# Altium PCB led_ring.PcbDoc
Units mm, origin at the board's own origin, x right, y up, seen from the top; angles counter-clockwise.
Board outline 28 x 28 mm, 2 copper layers (Top Layer, Bottom Layer), stack 0.97 mm thick; 20 components, 18 nets, 46 pads, 9 vias.
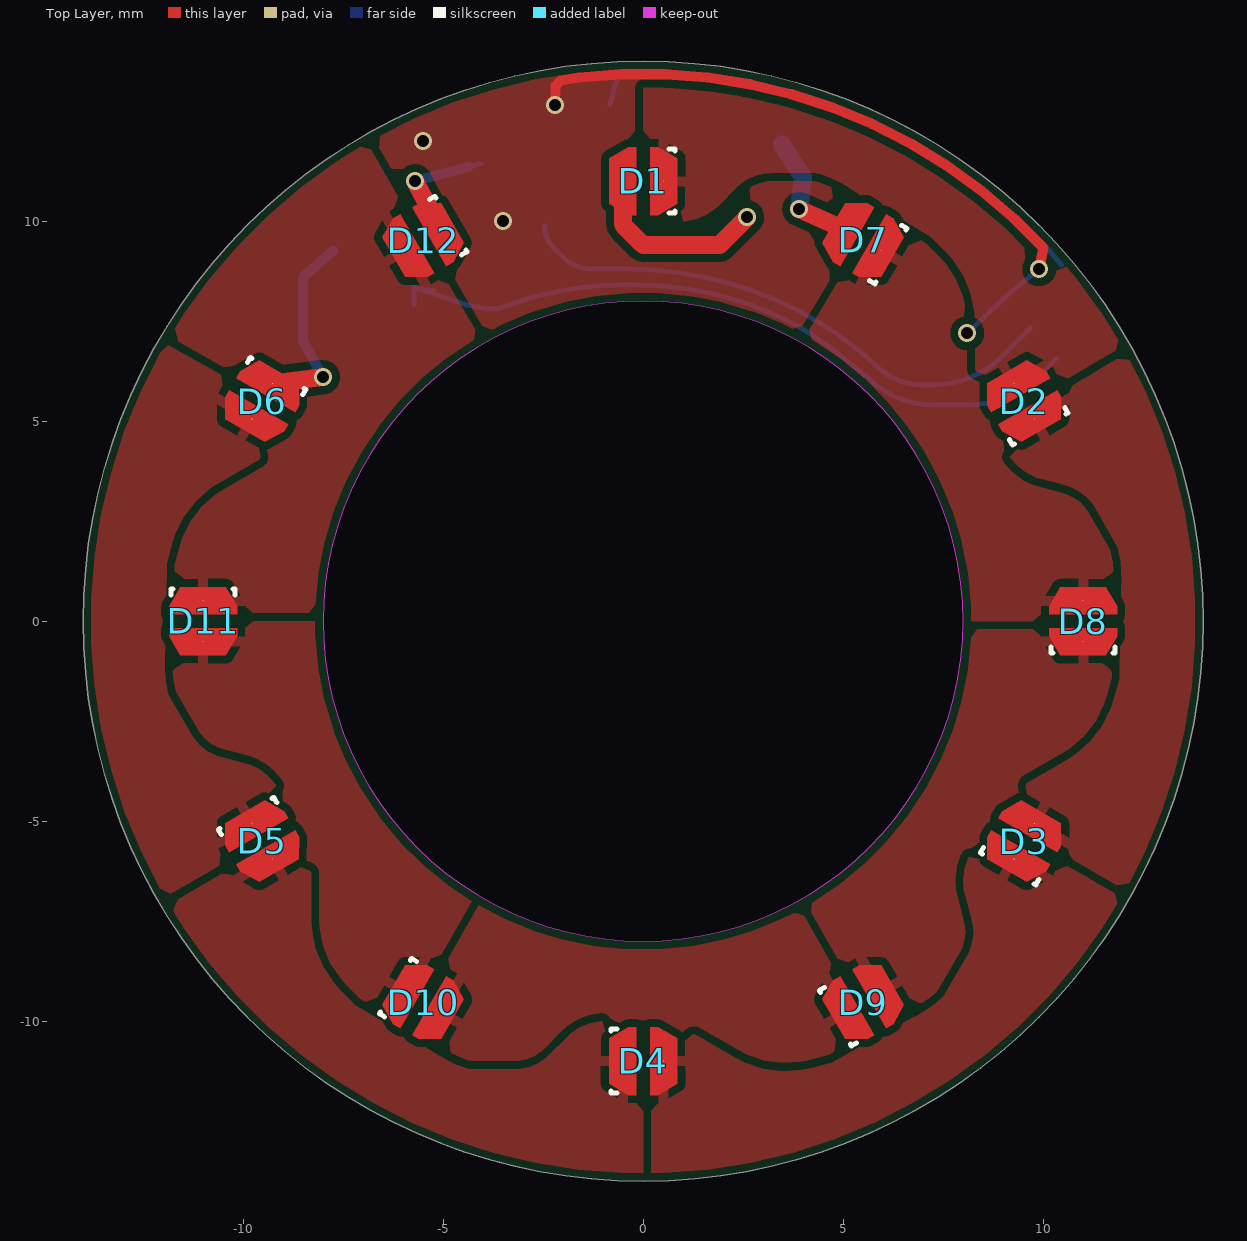
[diagram p0: Top Layer view]
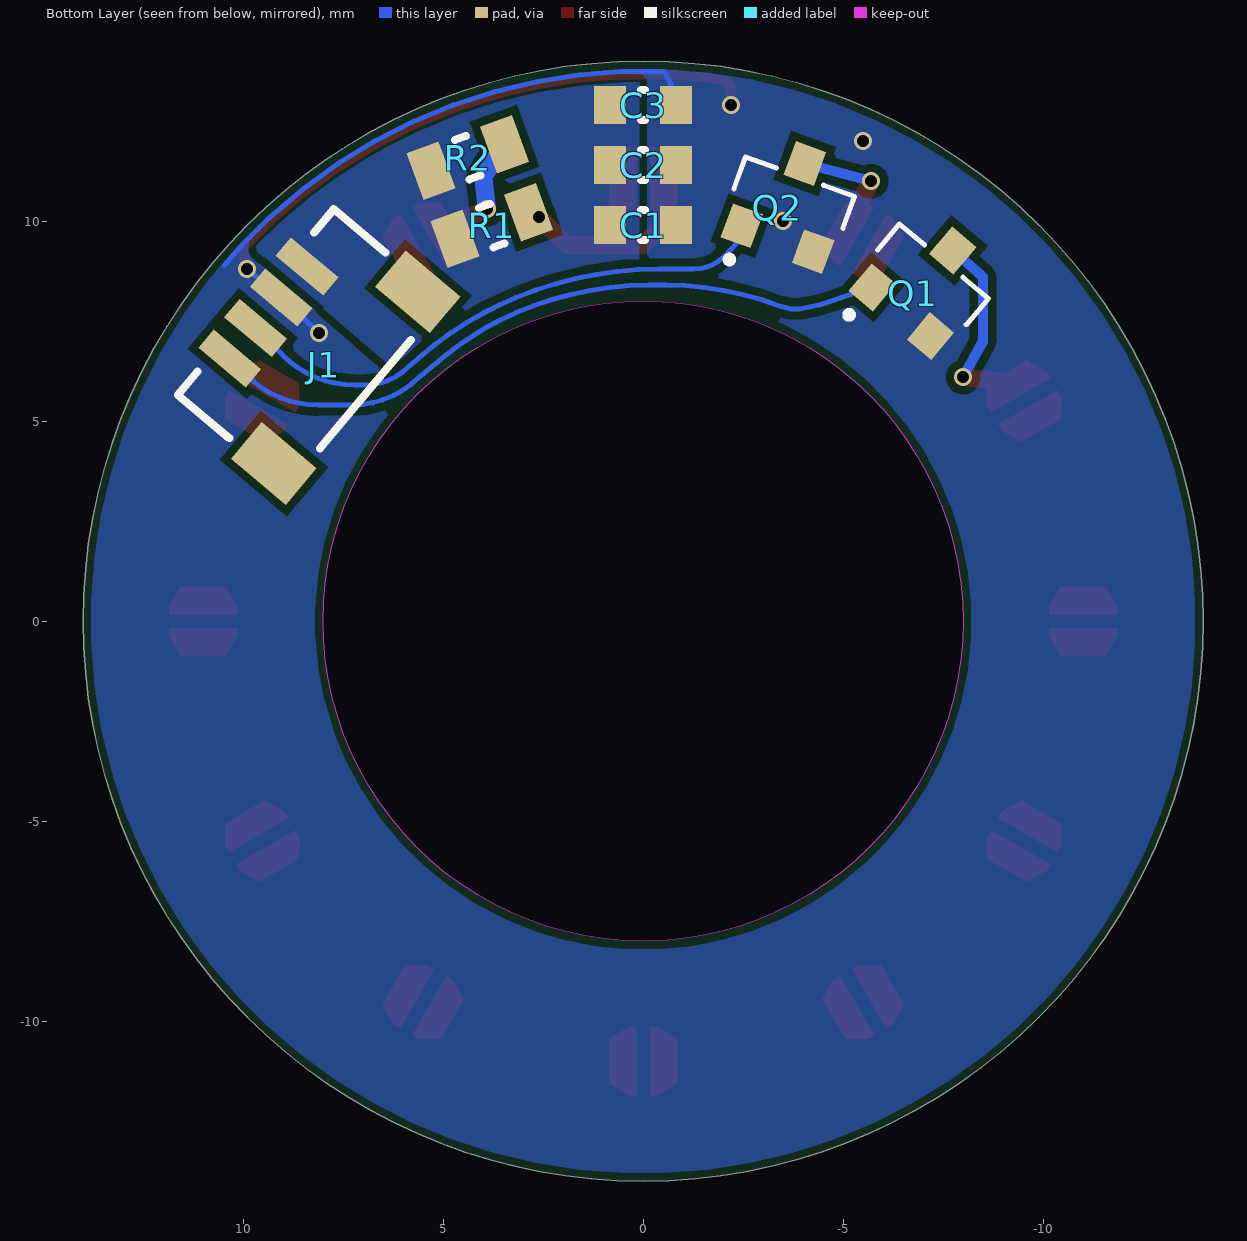
[diagram p1: Bottom Layer view, seen from below]
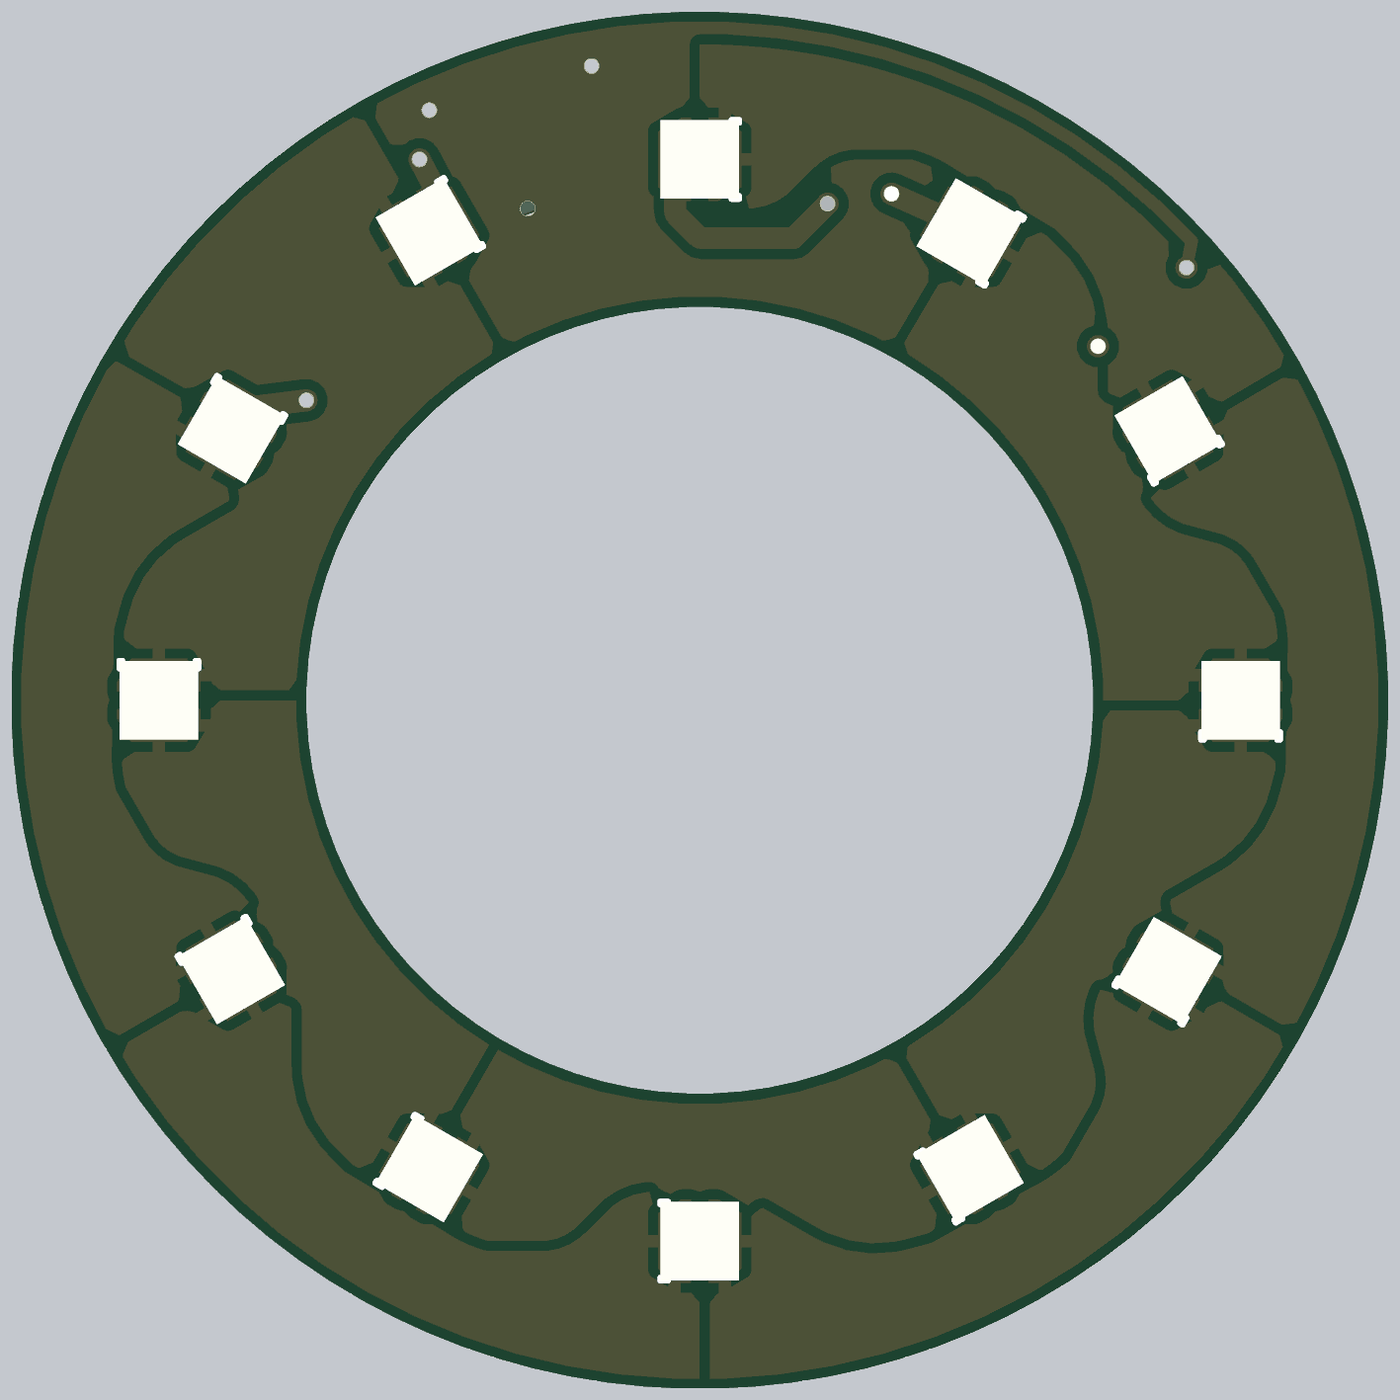
[diagram p2: 3D render of the assembled board from above, using the file's embedded part models]
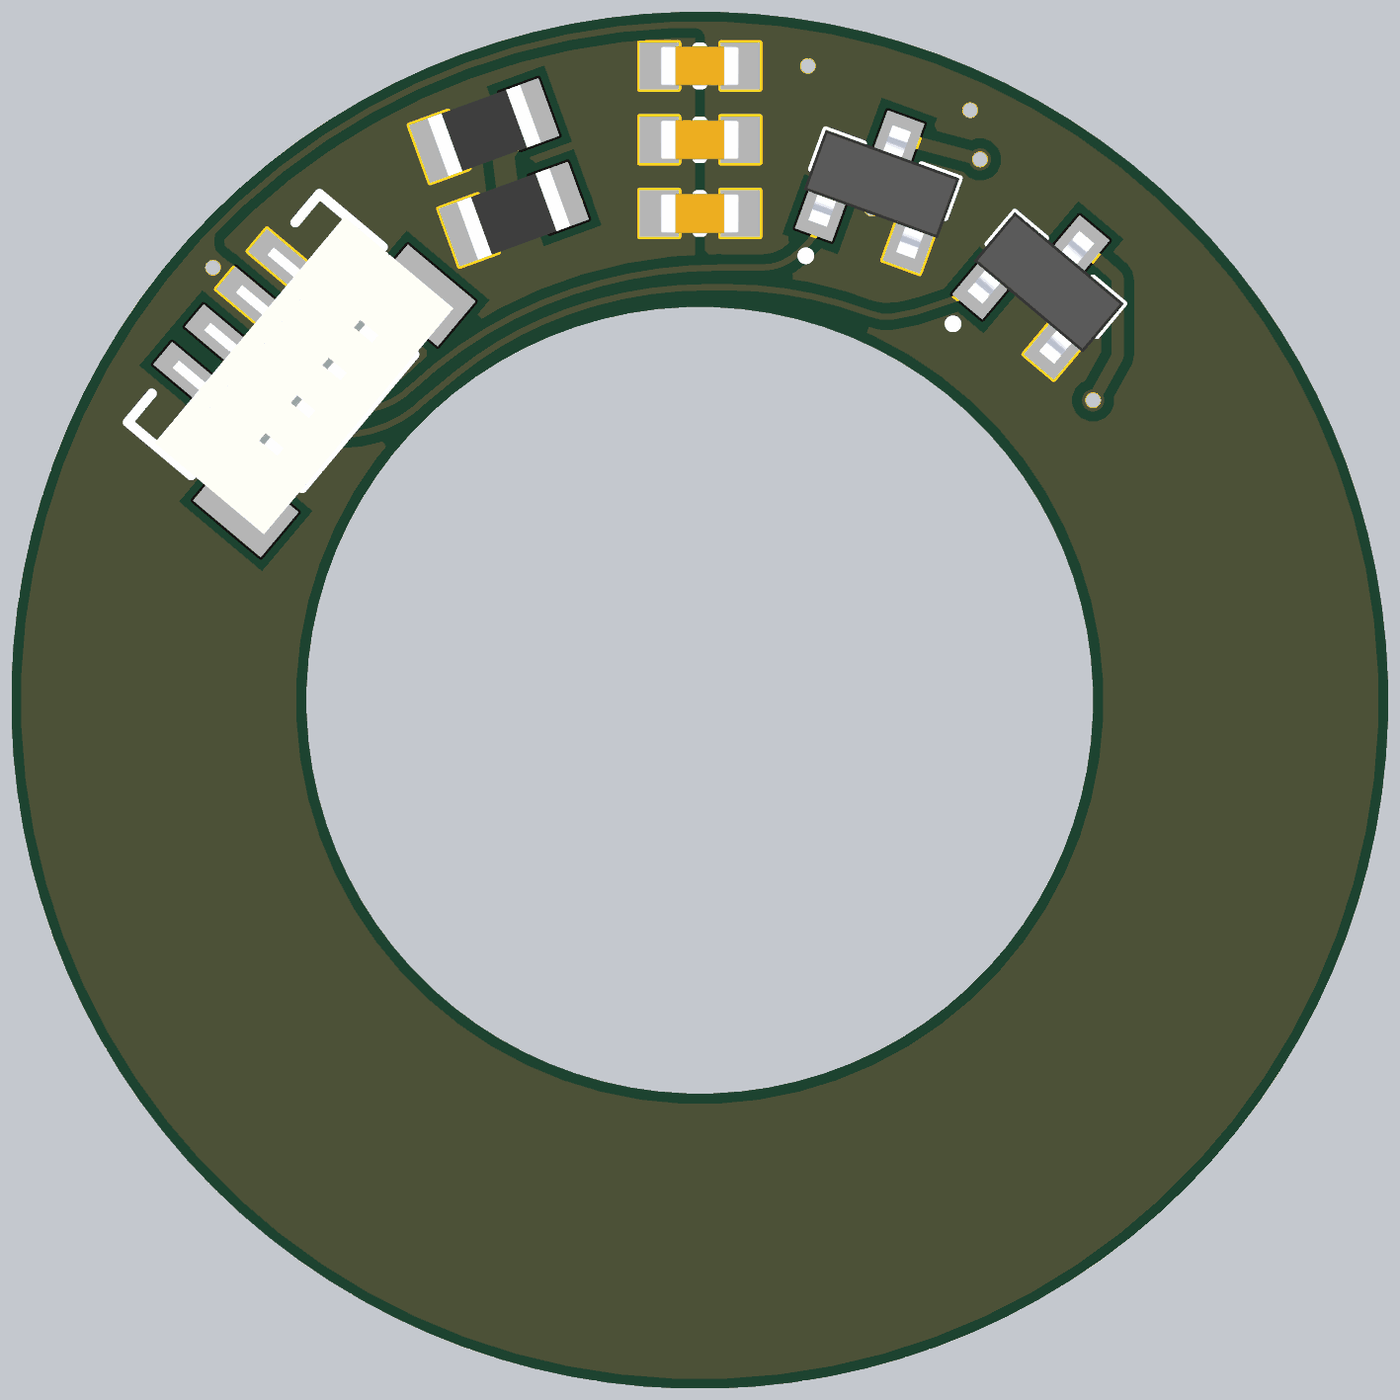
[diagram p3: 3D render of the assembled board from below, using the file's embedded part models]

## Layer stack, top to bottom
Top Solder: solder mask 0.015, SM-001, Dk 4
Top Layer: signal copper 0.035
Dielectric 5: core 0.9, FR4_TG135_TG150_Dk4.3_Df0.02, Dk 4.2
Bottom Layer: signal copper 0.035
Bottom Solder: solder mask 0.015, SM-001, Dk 4

## Board outline
-14,0 ccw(c0,0) 0,-14 ccw(c0,0) 14,0 ccw(c0,0) 0,14 ccw(c0,0)
cut-out: -8,0 ccw(c0,0) 0,-8 ccw(c0,0) 8,0 ccw(c0,0) 0,8 ccw(c0,0)

## Design rules (kind name [scope] priority, off if disabled: settings)
AssemblyTestPointUsage [All] p1: isadvanced=TRUE
AssemblyTestpoint [All] p1: isadvanced=TRUE testpointundercomponent=TRUE minsize=1.016 maxsize=2.54 preferedsize=1.524 minholesize=0 maxholesize=1.016 preferedholesize=0.813 testpointgrid=0.025 usegrid=TRUE gridoriginx=166.25 gridoriginy=192.7 gridtolerance=0 allowsidetop=TRUE allowsidebottom=TRUE
BoardOutlineClearance BoardOutlineClearance_1 [All] p1: isadvanced=TRUE gap=0.2 ignorepadtopadclearanceinfootprint=FALSE
Clearance Clearance_1 [All] p1: gap=0.2 ignorepadtopadclearanceinfootprint=FALSE
Clearance Clearance_1 [OnMid vs OnMid] p2: gap=0.1 ignorepadtopadclearanceinfootprint=FALSE sourcerule=43 cellrowname=All cellrowtype=0 cellcolname=All cellcoltype=0 innerlayers=TRUE
Clearance Clearance_2 [(ExistsOnLayer('Top Layer') Or ExistsOnLayer('Bottom Layer')) vs (ExistsOnLayer('Top Layer') Or ExistsOnLayer('Bottom Layer'))] p3: gap=0.1 ignorepadtopadclearanceinfootprint=FALSE sourcerule=43 cellrowname=All cellrowtype=0 cellcolname=All cellcoltype=0 outerlayers=TRUE
Clearance [All] p4: gap=0.254 ignorepadtopadclearanceinfootprint=FALSE ismatrix=TRUE
ComponentClearance ComponentClearance_LensHolder [InComponent('MP1')] p1: gap=-100 collisioncheckmode=3 verticalgap=-100 showdistances=FALSE
ComponentClearance [All] p2: isadvanced=TRUE gap=0.254 collisioncheckmode=3 verticalgap=0.254 showdistances=FALSE
FabricationTestPointUsage [All] p1: isadvanced=TRUE valid=0 allowmultiple=FALSE
FabricationTestpoint [All] p1: isadvanced=TRUE side=3 testpointundercomponent=TRUE minsize=1.016 maxsize=2.54 preferedsize=1.524 minholesize=0 maxholesize=1.016 preferedholesize=0.813 testpointgrid=0.025 allowsidetop=TRUE allowsidebottom=TRUE usegrid=TRUE gridoriginx=166.25 gridoriginy=192.7 gridtolerance=0
FanoutControl Fanout_BGA [IsBGA] p1: isadvanced=TRUE bgadir=Out bgaviamode=Centered fanoutstyle=Auto fanoutdirection=Alternating viagrid=0.025 // Fanout_BGA (Default Rule)
FanoutControl Fanout_LCC [IsLCC] p2: isadvanced=TRUE bgadir=Out bgaviamode=Centered fanoutstyle=Auto fanoutdirection=Alternating viagrid=0.025 // Fanout_LCC (Default Rule)
FanoutControl Fanout_SOIC [IsSOIC] p3: isadvanced=TRUE bgadir=Out bgaviamode=Centered fanoutstyle=Auto fanoutdirection=Alternating viagrid=0.025 // Fanout_SOIC (Default Rule)
FanoutControl Fanout_Small [(CompPinCount < 5)] p4: isadvanced=TRUE bgadir=Out bgaviamode=Centered fanoutstyle=Auto fanoutdirection=OutThenIn viagrid=0.025 // Fanout_Small (Default Rule)
FanoutControl Fanout_Default [All] p5: isadvanced=TRUE bgadir=Out bgaviamode=Centered fanoutstyle=Auto fanoutdirection=Alternating viagrid=0.025 // Fanout_Default (Default Rule)
Height [All] p1: isadvanced=TRUE minheight=0 maxheight=25.4 prefheight=12.7
HoleSize [All] p1: isadvanced=TRUE absolutevalues=TRUE maxlimit=5 minlimit=0.2 maxpercent=80.000 minpercent=20.000
HoleToHoleClearance [All] p1: isadvanced=TRUE gap=0.254 allowstackedmicrovias=TRUE
LayerPairs [All] p1: isadvanced=TRUE enforce=TRUE
MinimumSolderMaskSliver [All] p1: isadvanced=TRUE minsoldermaskwidth=0.1
NetAntennae [All] p1: isadvanced=TRUE netantennaetolerance=0
PasteMaskExpansion [All] p1: isadvanced=TRUE expansion=0
PlaneClearance [All] p1: isadvanced=TRUE clearance=0.254
PlaneConnect [All] p1: isadvanced=TRUE pad.planeconnectstyle=Relief pad.reliefexpansion=0.508 pad.reliefentries=4 pad.reliefconductorwidth=0.254 pad.reliefairgap=0.254 via.planeconnectstyle=Direct via.reliefexpansion=0.508 via.reliefentries=4 via.reliefconductorwidth=0.254 via.reliefairgap=0.254
PolygonConnect PolygonConnectStyle_Direct [IsNamedPolygon('PolygonDirect')] p1: isadvanced=TRUE connectstyle=Direct reliefconductorwidth=0.254 reliefentries=2 polygonreliefangle="0 Angle" airgapwidth=0.254
PolygonConnect [All] p2: thpad.connectstyle=Relief thpad.reliefconductorwidth=0.254 thpad.reliefentries=4 thpad.polygonreliefangle="90 Angle" thpad.airgapwidth=0.2 smdpad.connectstyle=Relief smdpad.reliefconductorwidth=0.254 smdpad.reliefentries=4 smdpad.polygonreliefangle="90 Angle" smdpad.airgapwidth=0.2 via.connectstyle=Direct via.reliefconductorwidth=0.127 via.reliefentries=4 via.polygonreliefangle="90 Angle" via.airgapwidth=0.127
RoutingCorners [All] p1: isadvanced=TRUE cornerstyle=45-Degree minsetback=2.54 maxsetback=2.54
RoutingPriority [All] p1: isadvanced=TRUE routingpriority=0
RoutingVias [All] p1: holewidth=0.3 width=0.45 viastyle="Through Hole" minholewidth=0.3 minwidth=0.45 maxholewidth=0.45 maxwidth=0.6
ShortCircuit [All] p1: isadvanced=TRUE allowed=FALSE
SilkToSilkClearance [All] p1: isadvanced=TRUE silktosilkclearance=0.127
SilkToSolderMaskClearance [IsPad] p1: isadvanced=TRUE minsilkscreentomaskgap=0.127 clearancetoexposedcopper=TRUE
SolderMaskExpansion SolderMaskExpansion_via [IsVia] p1: isadvanced=TRUE expansion=0.102 istentingtop=TRUE useseparateexpansions=TRUE expansionbottom=0.102 istentingbottom=TRUE
SolderMaskExpansion [All] p2: isadvanced=TRUE expansion=0.05 istentingtop=FALSE
SupplyNets "Schematic Supply Nets_2" [InNet('24V_VPOC')] p1: voltage=0.000
SupplyNets "Schematic Supply Nets" [InNet('GND')] p2: voltage=0.000
UnRoutedNet [All] p1: isadvanced=TRUE
UnpouredPolygon [All] p1: isadvanced=TRUE
Width [All] p1: maxlimit=1 minlimit=0.127 preferedwidth=0.254
4 further rules are at their usual default settings.

## Components (designator, comment, footprint, x,y, rotation, side; value= is the part's Value field where it differs from the comment)
C1 "CGA3E3X7R1H105K080AB" "Generic 0603 Capacitor" 0,9.9 r0 bottom value=1µF
C2 "CGA3E3X7R1H105K080AB" "Generic 0603 Capacitor" 0,11.4 r0 bottom value=1µF
C3 "CGA3E3X7R1H105K080AB" "Generic 0603 Capacitor" 0,12.9 r0 bottom value=1µF
D1 "MP-1616-1100-30-90" 1616_1.6x1.6x0.9_LED 0,11 r180 top
D2 "MP-1616-1100-30-90" 1616_1.6x1.6x0.9_LED 9.526,5.5 r120 top
D3 "MP-1616-1100-30-90" 1616_1.6x1.6x0.9_LED 9.526,-5.5 r60 top
D4 "MP-1616-1100-30-90" 1616_1.6x1.6x0.9_LED 0,-11 r0 top
D5 "MP-1616-1100-30-90" 1616_1.6x1.6x0.9_LED -9.526,-5.5 r300 top
D6 "MP-1616-1100-30-90" 1616_1.6x1.6x0.9_LED -9.526,5.5 r240 top
D7 "MP-1616-1100-30-90" 1616_1.6x1.6x0.9_LED 5.5,9.526 r150 top
D8 "MP-1616-1100-30-90" 1616_1.6x1.6x0.9_LED 11,0 r90 top
D9 "MP-1616-1100-30-90" 1616_1.6x1.6x0.9_LED 5.5,-9.526 r30 top
D10 "MP-1616-1100-30-90" 1616_1.6x1.6x0.9_LED -5.5,-9.526 r330 top
D11 "MP-1616-1100-30-90" 1616_1.6x1.6x0.9_LED -11,0 r270 top
D12 "MP-1616-1100-30-90" 1616_1.6x1.6x0.9_LED -5.5,9.526 r210 top
J1 "BM04B-SRSS-TB(LF)(SN)" "JST BM04B-SRSS-TB" 8.4,6.9 r310 bottom
Q1 "DMN61D8L-7" "Diodes SOT23" -7.1,8.5 r220 bottom
Q2 "DMN61D8L-7" "Diodes SOT23" -3.7,10.5 r200 bottom
R1 "TFA0805R60R4F-T5" "0805 Resistor" 3.783,9.888 r160 bottom value=60.4
R2 "TFA0805R60R4F-T5" "0805 Resistor" 4.383,11.588 r160 bottom value=60.4

## Footprints (in the part's own frame and the unit in brackets; to place one, negate y for a bottom-side part, rotate by r counter-clockwise, add the part's x,y. Pads: shape width x height; smd on the part's side, far side on the other; paste and mask are expansions set on the pad)
"0805 Resistor" [mm] "Chip Resistor, 2-Leads, Body 2.00x1.20mm, IPC Medium Density"
  rect 0.85x1.25 smd: 1(-0.975,0) 2(0.975,0)
  silkscreen extent -0.15,-0.53 0.15,0.53, body extent -1,-0.62 1,0.62, height 0.5
1616_1.6x1.6x0.9_LED [mil]
  round 1 smd: 1(-20.18,0) 2(20.18,0)
  silkscreen extent -31,-31 -26,31, body extent -31,-31 31,31, height 36
"Diodes SOT23" [mm] "SOT23"
  rect 0.8x0.9 smd: 1(-0.95,-1) 2(0.95,-1) 3(0,1)
  silkscreen extent -1.45,-1.97 1.45,0.65, body extent -1.45,-1.2 1.45,1.2, height 1.14
"Generic 0603 Capacitor" [mm] "Chip Capacitor, 2-Leads, Body 1.60x0.80mm, IPC Medium Density"
  rect 0.8x0.95 smd: 1(-0.825,0) 2(0.825,0)
  silkscreen extent -0.05,-0.38 0.05,0.38, body extent -0.8,-0.4 0.8,0.4, height 0.95
"JST BM04B-SRSS-TB" [mm] "1.0mm pitch/Disconnectable Crimp style connector"
  rect 0.6x1.55 smd: 1(-1.5,-1.263) 2(-0.5,-1.262) 3(0.5,-1.263) 4(1.5,-1.262)
  rect 1.2x1.8 smd: M(-2.8,1.262) M(2.8,1.262)
  silkscreen extent -3.03,-1.68 3.03,1.91, body extent -3,-1.69 3,1.91, height 4.32

## Part data
C1 C2 C3: library part CMP-001-00097-2, "Automotive Grade, Mlcc, 0603, X7R, 5", Capacitor Type=Ceramic, Case/Package=0603, Max Operating Temperature=125°C, Min Operating Temperature=-55°C, Temperature Coefficient=X7R, Tolerance=10%, Voltage Rating=50V, AECQ=Yes, Pins=2, RoHS Compliant=Yes
D1 D2 D3 D4 D5 D6 D7 D8 D9 D10 D11 D12: library part CMP-007-00050-1, "Single Color LED, Warm White, 1.6mm", Case/Package=1616, Colour=White, Forward Current=3.3A, Forward Voltage=3.5V, Max Operating Temperature=85°C, Min Operating Temperature=-40°C, Pins=2
J1: "CONN HEADER SMD 4POS 1MM", Current Rating (Amps)=0.7A, Insulation Color=Natural, Manufacturer="JST Sales America Inc.", Material Flammability Rating="UL94 V-0", Operating Temperature="-25°C ~ 85°C", Supplier Part Number 1=455-1790-1-ND, Voltage Rating=50V, ComponentLink1Description=Datasheet, ComponentLink1URL=http://www.jst-mfg.com/product/pdf/eng/eSH.pdf, ComponentLink2Description="DigiKey Link", ComponentLink2URL=http://digikey.com/product-detail/en/jst-sales-america-inc/BM04B-SRSS-TB-LF-SN/455-1790-1-ND/926861, Connector Type=Header, Contact Finish - Mating=Tin, Contact Finish - Post=Tin, Contact Material="Copper Alloy", Contact Shape=Square, Contact Type="Male Pin", Fastening Type=Push-Pull, Features="Solder Retention", Insulation Height="0.167\" (4.25mm)", Insulation Material="Polyamide (PA), Nylon", LastUpdated="8/24/2020 1:45:53 PM", Lifecycle Status=Active, Minimum Order=1, Mounting Type="Surface Mount", Number of Positions=4, Number of Positions Loaded=All, Number of Rows=1, Packaging=TapeAndReel, Part Number=BM04B-SRSS-TB(LF)(SN), Part Status=Active, PartId=16, Pitch - Mating="0.039\" (1.00mm)", Price=0.29, Row Spacing - Mating="-25°C ~ 85°C", Series=SR, Shrouding="Shrouded - 4 Wall", Style="Board to Cable/Wire", Supplier 1=DigiKey, Termination=Solder
Q1 Q2: library part CMP-013-00041-1, "DMN61D8L Series 60 V 470 mA 1.8 Ohm Surface Mount N-Channel Mosfet - SOT-23-3", Case/Package=SOT-23-3, Max Operating Temperature=150°C, Min Operating Temperature=-55°C, Mounting Technology="Surface Mount", RoHS Compliant=Yes, Transistor Type=n-FET
R1 R2: library part CMP-009-00189-2, "Res 60.4 Ohm 1% 1/8W 0805", Case/Package=0805, Power=125mW, Tolerance=1%, AECQ=Yes, Manufacturer Part Number=TFA0805R60R4F-T5, Mounting Technology=SMD, Pins=2

## Via types
v1: diameter 0.45, hole 0.3, Top Layer to Bottom Layer, tented both sides, 9 vias

## Nets (pads, with @x,y where several pads share a name; then routed paths per layer and width w, separated by ;. In a path a pad name is that pad's centre, name@x,y a point inside that pad or via, vN(x,y) a via of type N, cw(c..) or ccw(c..) an arc to the next point about the centre after c; other vN are vias at no path point)
24V_VPOC: C1.2 C2.2 C3.2 J1.1 R1.1 R2.1
EN0: J1.4 Q1.1 | length 18.3
  Bottom Layer w0.127: Q1.1@-5.729,7.908 Q1.1 ; Q1.1@-5.244,8.247 Q1.1 ; -4.408,7.903 -5.3,8.201 Q1.1 ; -4.406,7.902 ccw(c-4.367,8.023) -4.393,7.899 -3.912,7.802 ; -3.911,7.802 ccw(c-3.887,7.927) -3.887,7.8 -3.717,7.8 ccw(c-3.717,7.927) -3.683,7.805 -3.413,7.879 cw(c-0.562,0.342) -0.56,8.4 -0.151,8.4 ; -0.15,8.4 cw(c-0.144,0.06) 3.2,7.7 cw(c0.134,0.697) 4.907,6.669 ; 4.907,6.668 5.605,6.096 ccw(c7.285,7.777) 7.285,5.4 8.117,5.4 ccw(c8.117,7.94) 9.913,6.144 J1.4
EN1: J1.3 Q2.1 | length 13.9
  Bottom Layer w0.127: Q2.1 ccw(c-1.693,9.885) -2.239,9.339 -2,9.1 ccw(c-1.276,9.824) -1.276,8.8 -0.405,8.8 ; -0.404,8.8 cw(c-0.402,-0.562) 3.189,8.084 cw(c-0.211,-0.102) 5.866,6.351 ; 5.867,6.356 ccw(c6.967,7.456) 6.967,5.9 7.208,5.9 ccw(c7.208,8.44) 9.004,6.644 J1.3
GND: C1.1 C2.1 C3.1 J1.2 Q1.2 Q2.2 | length 30.2
  Top Layer w0.254: v1(-2.2,12.9) -2.19,13.387 -2.06,13.517 -1.608,13.589 -1.598,13.589 -0.547,13.672 cw(c-0.527,13.419) -0.527,13.673 0.527,13.673 cw(c0.527,13.419) 0.547,13.672 1.598,13.589 cw(c1.578,13.336) 1.618,13.587 2.66,13.422 cw(c2.62,13.171) 2.679,13.418 3.705,13.172 cw(c3.645,12.925) 3.724,13.167 4.727,12.841 cw(c4.648,12.599) 4.745,12.834 5.72,12.43 5.729,12.427 6.686,11.939 7.602,11.377 8.471,10.746 9.288,10.048 10.005,9.332 v1(9.9,8.8)
  Bottom Layer w0.127: C3.1 -0.732,13.311 cw(c1.288,12.628) -0.563,13.687 -0.551,13.699 -0.514,13.737 0.54,13.737 1.616,13.652 2.682,13.483 3.732,13.231 4.758,12.897 5.755,12.484 5.76,12.482 6.713,11.997 cw(c6.655,11.883) 6.721,11.992 7.633,11.433 cw(c7.567,11.325) 7.642,11.427 8.507,10.799 8.511,10.796 9.332,10.095 10.095,9.332 10.462,8.902 ; v1(8.1,7.2) 8.528,7.605 J1.2 9.594,8.548 v1(9.9,8.8)
  other v1: -3.5,10 -5.5,12
NetD1_1: D1.1 D2.2
NetD1_2: D1.2 R1.2 | length 4.7
  Top Layer w0.45: D1.2 -0.501,9.952 ; -0.501,9.951 ccw(c-0.374,9.953) -0.497,9.921 ccw(c-0.374,9.953) -0.463,9.863 -0.037,9.437 ; -0.037,9.437 ccw(c0.053,9.527) 0.053,9.4 1.905,9.4 2.6,10.095 v1(2.6,10.1)
NetD2_1: D2.1 D3.2
NetD3_1: D3.1 D4.2
NetD4_1: D4.1 D5.2
NetD5_1: D5.1 D6.2
NetD6_1: D6.1 Q1.3 | length 4.9
  Top Layer w0.45: D6.1 v1(-8,6.1)
  Bottom Layer w0.254: -8.485,6.972 cw(c-8.373,7.033) -8.5,7.032 -8.5,8.543 cw(c-8.373,8.543) -8.475,8.619 cw(c-8.373,8.543) -8.457,8.638 -7.996,9.044 Q1.3 ; -8.484,6.971 v1(-8,6.1)
NetD7_1: D7.1 D8.2
NetD7_2: D7.2 R2.2 | length 3
  Top Layer w0.45: v1(3.9,10.3) D7.2
  Bottom Layer w0.45: R2.2 3.713,11.542 3.975,11.139 cw(c3.868,11.07) 3.98,11.13 cw(c3.868,11.07) 3.994,11.054 v1(3.9,10.3)
NetD8_1: D8.1 D9.2
NetD9_1: D9.1 D10.2
NetD10_1: D10.1 D11.2
NetD11_1: D11.1 D12.2
NetD12_1: D12.1 Q2.3 | length 3.1
  Top Layer w0.45: v1(-5.7,11) D12.1
  Bottom Layer w0.127: Q2.3@-4.369,11.353 Q2.3
  Bottom Layer w0.254: v1(-5.7,11) Q2.3@-4.369,11.353
pads on no net: J1.M

## Polygon pours and split planes (outlines as drawn)
GND on Bottom Layer "PolygonDirect" (solid, pour order 1): -14,14 -14,-14 14,-14 14,14
24V_VPOC on Bottom Layer "PolygonDirect" (solid, pour order 0): 0.1,14.7 0.1,7.6 2.7,5 4.5,4.8 10.3,9.8 7.4,14.2
NetD9_1 on Top Layer "NONET_L-01_P-001" (solid, pour order 14): 6.007,-10.396 3.779,-6.454 -3.8,-6.582 -7.35,-12.731 0.088,-16.448 7.199,-12.932
NetD3_1 on Top Layer "NONET_L-01_P-001" (solid, pour order 10): 8.66,-5 8.193,-5.809 ccw(c9.376,-6.492) 8.057,-6.845 8.22,-7.455 cw(c7.054,-7.768) 8.099,-8.371 7.532,-9.354 cw(c5.547,-7.366) 6.753,-9.903 4.714,-11.035 4.227,-11.166 cw(c3.57,-8.713) 2.3,-10.912 0.822,-10.059 ccw(c0.652,-10.354) 0.563,-10.025 -0.02,-10.034 -0.054,-12.093 -0.038,-14.066 0.527,-14.82 ccw(c1.15,-11.239) 2.347,-14.671 8.205,-13.101 ccw(c7.548,-10.649) 9.747,-11.918 12.471,-7.2
NetD4_1 on Top Layer "NONET_L-01_P-001" (solid, pour order 9): 0,-10 -0.934,-10 ccw(c-0.934,-11.366) -1.9,-10.4 -2.346,-10.846 cw(c-3.2,-9.993) -3.2,-11.2 -4.334,-11.2 cw(c-3.606,-8.487) -5.2,-10.8 -7.2,-9.6 -7.556,-9.244 cw(c-5.761,-7.448) -8.3,-7.448 -8.3,-5.741 ccw(c-8.641,-5.741) -8.4,-5.5 -8.7,-5 -10.5,-6 -12.2,-7 -12.571,-7.866 ccw(c-9.158,-6.615) -11.532,-9.368 -7.244,-13.656 ccw(c-5.448,-11.861) -5.448,-14.4 0,-14.4
NetD11_1 on Top Layer "NONET_L-01_P-001" (solid, pour order 16): -12.007,-0.004 -7.479,-0.046 -3.8,6.582 -7.35,12.731 -14.288,8.148 -14.799,0.232
NetD10_1 on Top Layer "NONET_L-01_P-001" (solid, pour order 15): -6,-10.4 -3.7,-6.5 -7.6,0 -14.7,0 -14.2,-8.3 -7.6,-12.7
NetD5_1 on Top Layer "NONET_L-01_P-001" (solid, pour order 4): -8.66,-5 -9.127,-4.191 ccw(c-10.31,-4.874) -9.957,-3.555 -10.567,-3.391 cw(c-10.254,-2.225) -11.299,-2.829 -11.867,-1.846 cw(c-9.153,-1.121) -11.953,-0.897 -11.914,1.435 -11.784,1.922 cw(c-9.331,1.265) -10.6,3.464 -9.122,4.317 ccw(c-9.293,4.613) -8.963,4.525 -8.68,5.034 -10.446,6.093 -12.162,7.066 -13.098,6.954 ccw(c-10.308,4.624) -13.879,5.303 -15.448,-0.555 ccw(c-12.996,-1.212) -15.195,-2.482 -12.471,-7.2
GND on Top Layer "NONET_L-01_P-001" (solid, pour order 17): -8.8,14.7 -3.8,4.9 3.6,5.5 8.2,13.4 0.2,16.4
NetD7_1 on Top Layer "NONET_L-01_P-001" (solid, pour order 12): 6,10.4 3.7,6.5 7.6,0 14.7,0 14.2,8.3 7.6,12.7
NetD1_1 on Top Layer "NONET_L-01_P-001" (solid, pour order 8): 0,10 0.934,10 ccw(c0.934,11.366) 1.9,10.4 2.346,10.846 cw(c3.2,9.993) 3.2,11.2 4.334,11.2 cw(c3.606,8.487) 5.2,10.8 7.2,9.6 7.556,9.244 cw(c5.761,7.448) 8.3,7.448 8.3,5.741 ccw(c8.641,5.741) 8.4,5.5 8.7,5 10.5,6 12.2,7 12.571,7.866 ccw(c9.158,6.615) 11.532,9.368 7.244,13.656 ccw(c5.448,11.861) 5.448,14.4 0,14.4
NetD2_1 on Top Layer "NONET_L-01_P-001" (solid, pour order 11): 8.66,5 9.127,4.191 ccw(c10.31,4.874) 9.957,3.555 10.567,3.391 cw(c10.254,2.225) 11.299,2.829 11.867,1.846 cw(c9.153,1.121) 11.953,0.897 11.914,-1.435 11.784,-1.922 cw(c9.331,-1.265) 10.6,-3.464 9.122,-4.317 ccw(c9.293,-4.613) 8.963,-4.525 8.68,-5.034 10.446,-6.093 12.162,-7.066 13.098,-6.954 ccw(c10.308,-4.624) 13.879,-5.303 15.448,0.555 ccw(c12.996,1.212) 15.195,2.482 12.471,7.2
NetD8_1 on Top Layer "NONET_L-01_P-001" (solid, pour order 13): 12.007,0.004 7.479,0.046 3.8,-6.582 7.35,-12.731 14.288,-8.148 14.799,-0.232

## Other copper
Top Layer:
  region net NetD2_1: 8.878,-4.923 10.35,-5.773 10.45,-5.6 10.445,-5.049 9.458,-4.479 8.978,-4.75
  region net NetD3_1: 8.703,-5.227 10.175,-6.077 10.075,-6.25 9.595,-6.521 8.608,-5.951 8.603,-5.4
  region net NetD7_2: 4.923,8.878 5.773,10.35 5.6,10.45 5.049,10.445 4.479,9.458 4.75,8.978
  region net NetD7_1: 5.227,8.703 6.077,10.175 6.25,10.075 6.521,9.595 5.951,8.608 5.4,8.603
  region net NetD1_2: -0.175,10.15 -0.175,11.85 -0.375,11.85 -0.85,11.57 -0.85,10.43 -0.375,10.15
  region net NetD1_1: 0.175,10.15 0.175,11.85 0.375,11.85 0.85,11.57 0.85,10.43 0.375,10.15
  region net NetD11_1: -5.227,8.703 -6.077,10.175 -6.25,10.075 -6.521,9.595 -5.951,8.608 -5.4,8.603
  region net NetD12_1: -4.923,8.878 -5.773,10.35 -5.6,10.45 -5.049,10.445 -4.479,9.458 -4.75,8.978
  region net NetD10_1: -10.15,-0.175 -11.85,-0.175 -11.85,-0.375 -11.57,-0.85 -10.43,-0.85 -10.15,-0.375
  region net NetD11_1: -10.15,0.175 -11.85,0.175 -11.85,0.375 -11.57,0.85 -10.43,0.85 -10.15,0.375
  region net NetD9_1: -4.923,-8.878 -5.773,-10.35 -5.6,-10.45 -5.049,-10.445 -4.479,-9.458 -4.75,-8.978
  region net NetD10_1: -5.227,-8.703 -6.077,-10.175 -6.25,-10.075 -6.521,-9.595 -5.951,-8.608 -5.4,-8.603
  region net NetD8_1: 5.227,-8.703 6.077,-10.175 6.25,-10.075 6.521,-9.595 5.951,-8.608 5.4,-8.603
  region net NetD9_1: 4.923,-8.878 5.773,-10.35 5.6,-10.45 5.049,-10.445 4.479,-9.458 4.75,-8.978
  region net NetD7_1: 10.15,0.175 11.85,0.175 11.85,0.375 11.57,0.85 10.43,0.85 10.15,0.375
  region net NetD8_1: 10.15,-0.175 11.85,-0.175 11.85,-0.375 11.57,-0.85 10.43,-0.85 10.15,-0.375
  region net NetD5_1: -8.878,4.923 -10.35,5.773 -10.45,5.6 -10.445,5.049 -9.458,4.479 -8.978,4.75
  region net NetD6_1: -8.703,5.227 -10.175,6.077 -10.075,6.25 -9.595,6.521 -8.608,5.951 -8.603,5.4
  region net NetD4_1: -8.703,-5.227 -10.175,-6.077 -10.075,-6.25 -9.595,-6.521 -8.608,-5.951 -8.603,-5.4
  region net NetD5_1: -8.878,-4.923 -10.35,-5.773 -10.45,-5.6 -10.445,-5.049 -9.458,-4.479 -8.978,-4.75
  region net NetD3_1: 0.175,-10.15 0.175,-11.85 0.375,-11.85 0.85,-11.57 0.85,-10.43 0.375,-10.15
  region net NetD4_1: -0.175,-10.15 -0.175,-11.85 -0.375,-11.85 -0.85,-11.57 -0.85,-10.43 -0.375,-10.15
  region net NetD1_1: 8.702,5.226 10.175,6.076 10.075,6.25 9.595,6.521 8.607,5.951 8.602,5.4
  region net NetD2_1: 8.877,4.923 10.35,5.773 10.45,5.6 10.445,5.049 9.457,4.479 8.977,4.75

## Silkscreen, mask and mechanical layers (free items; w line width, h text height)
Board Shape:
  circle w0.1: c0,0 r14
  circle w0.1: c0,0 r8

## Dimensions
0,0 to 17.5,-2 on Notes (Mech3)
0,0 to 13.027,13.027 on Notes (Mech3)